# Altium PCB EvoHD_Lite_RevA.PcbDoc
Units mm, origin at the board's own origin, x right, y up, seen from the top; angles counter-clockwise.
Board outline 40 x 60 mm, 2 copper layers (Top Layer, Bottom Layer), stack 1.57 mm thick; 33 components, 53 nets, 321 pads, 38 vias.
Unrouted connection lines stored in the file: 56.
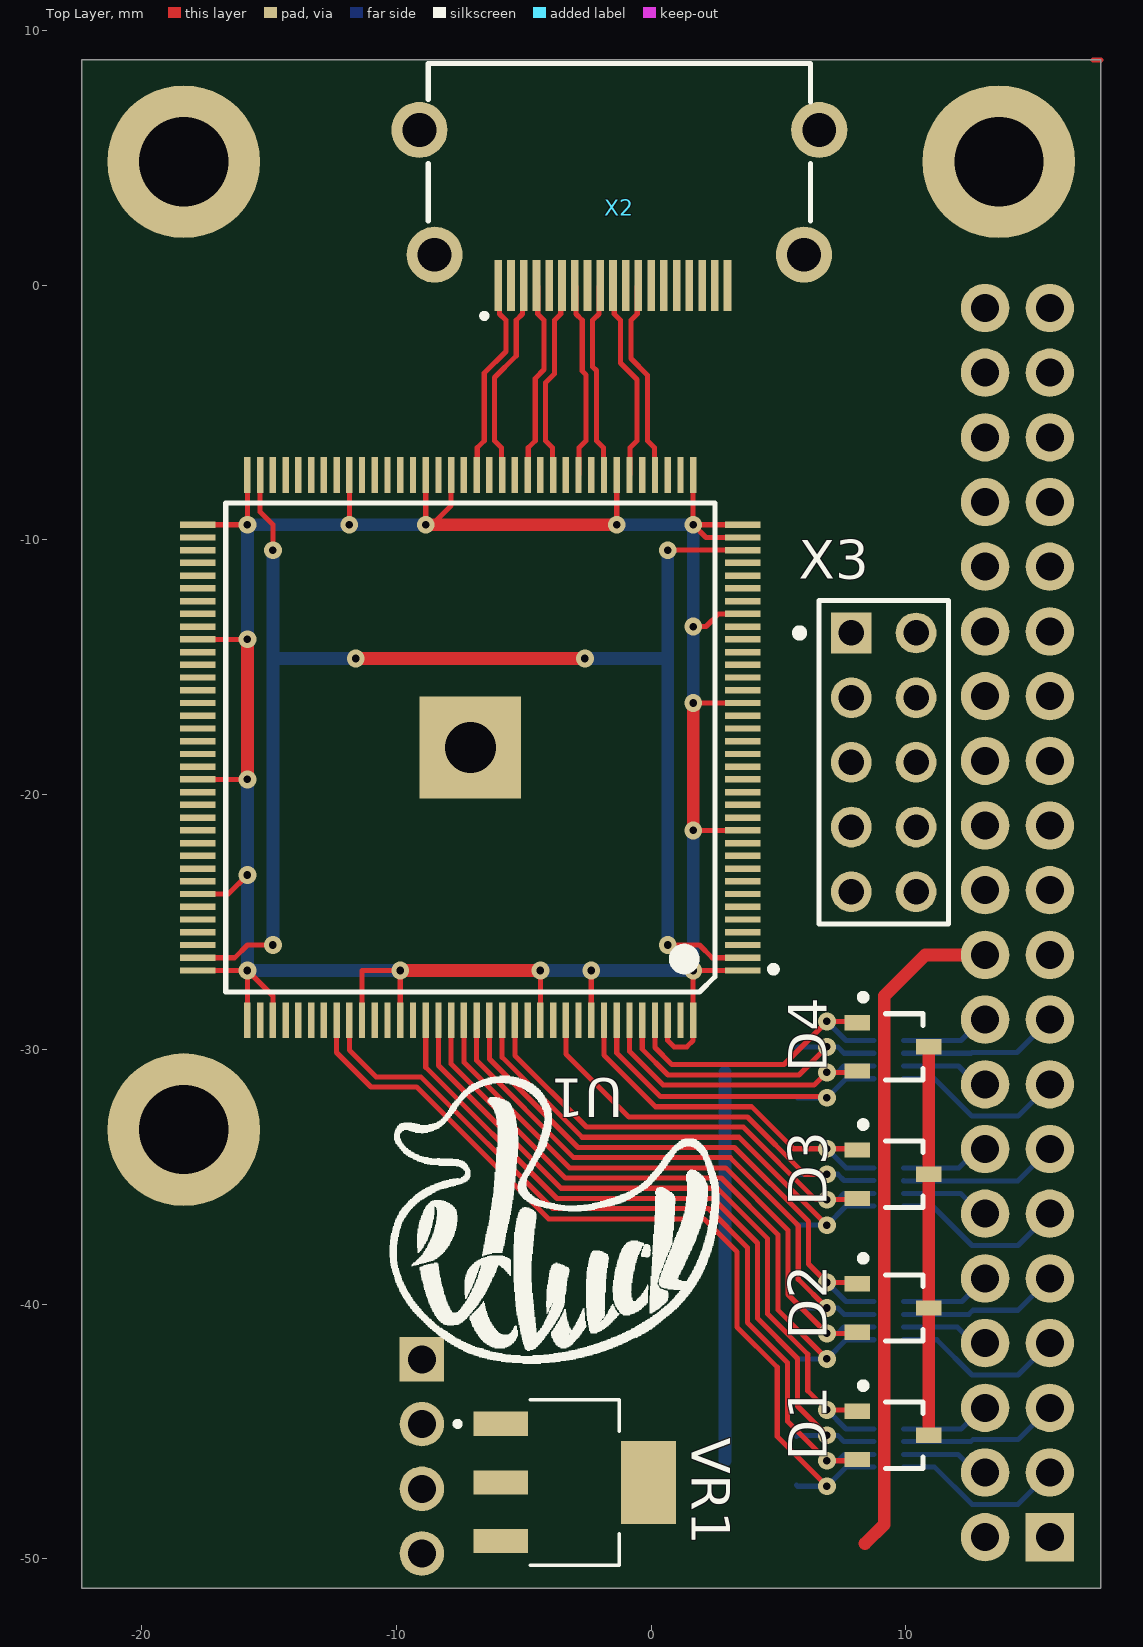
[diagram p0: Top Layer view]
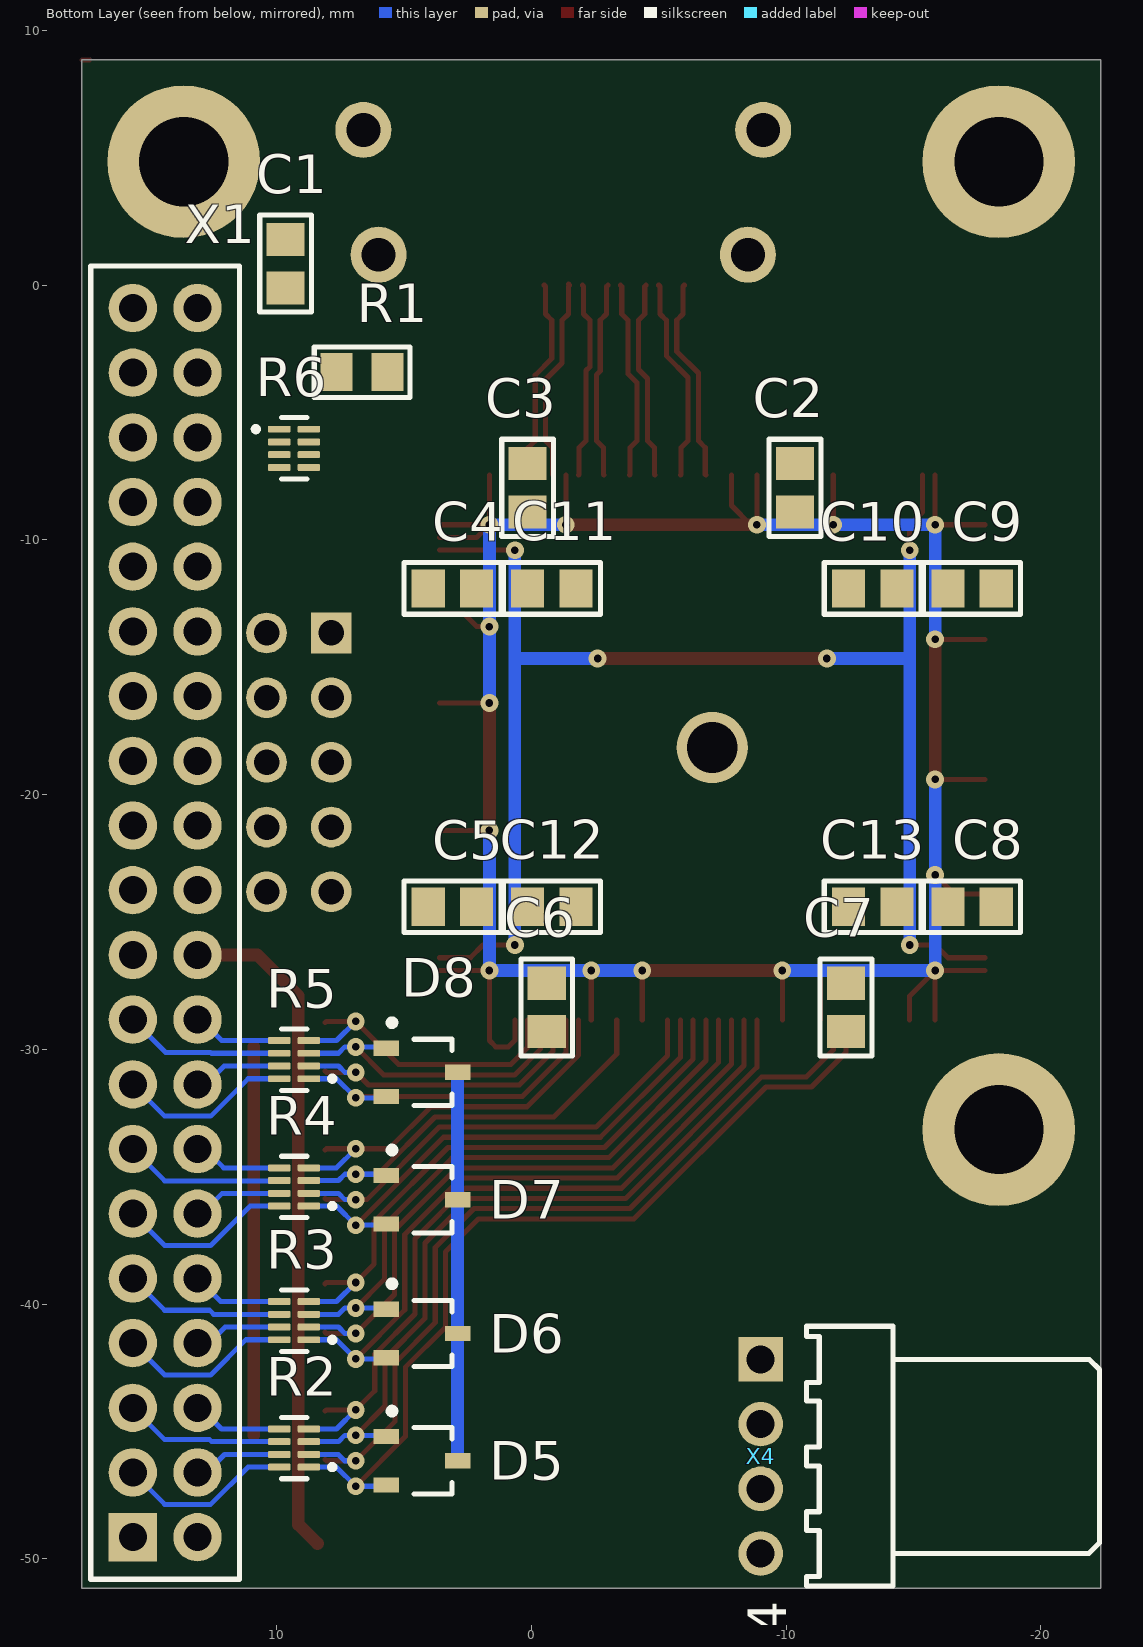
[diagram p1: Bottom Layer view, seen from below]
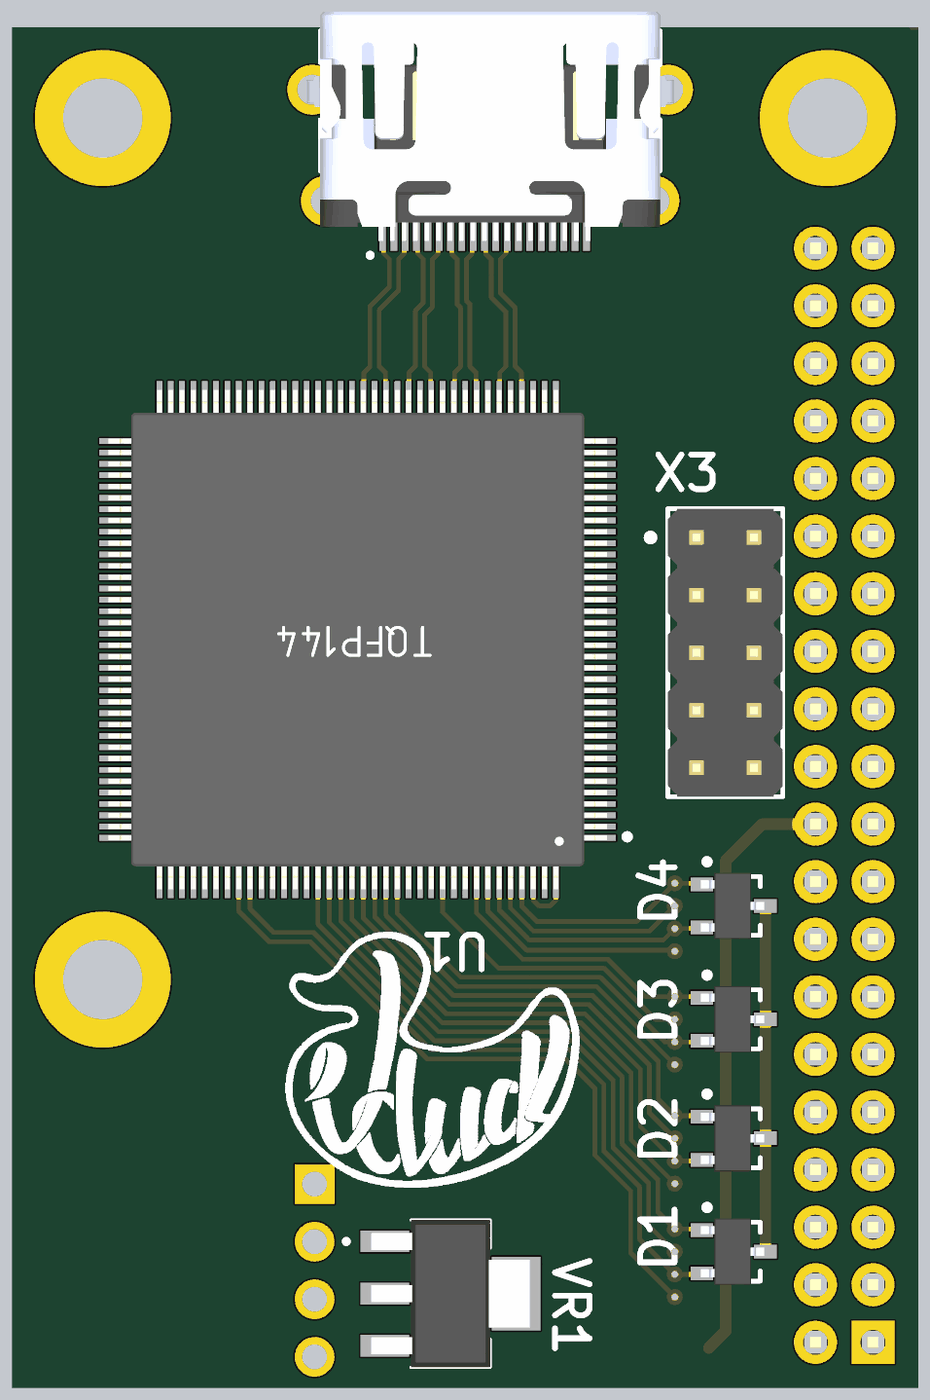
[diagram p2: 3D render of the assembled board from above, using the file's embedded part models]
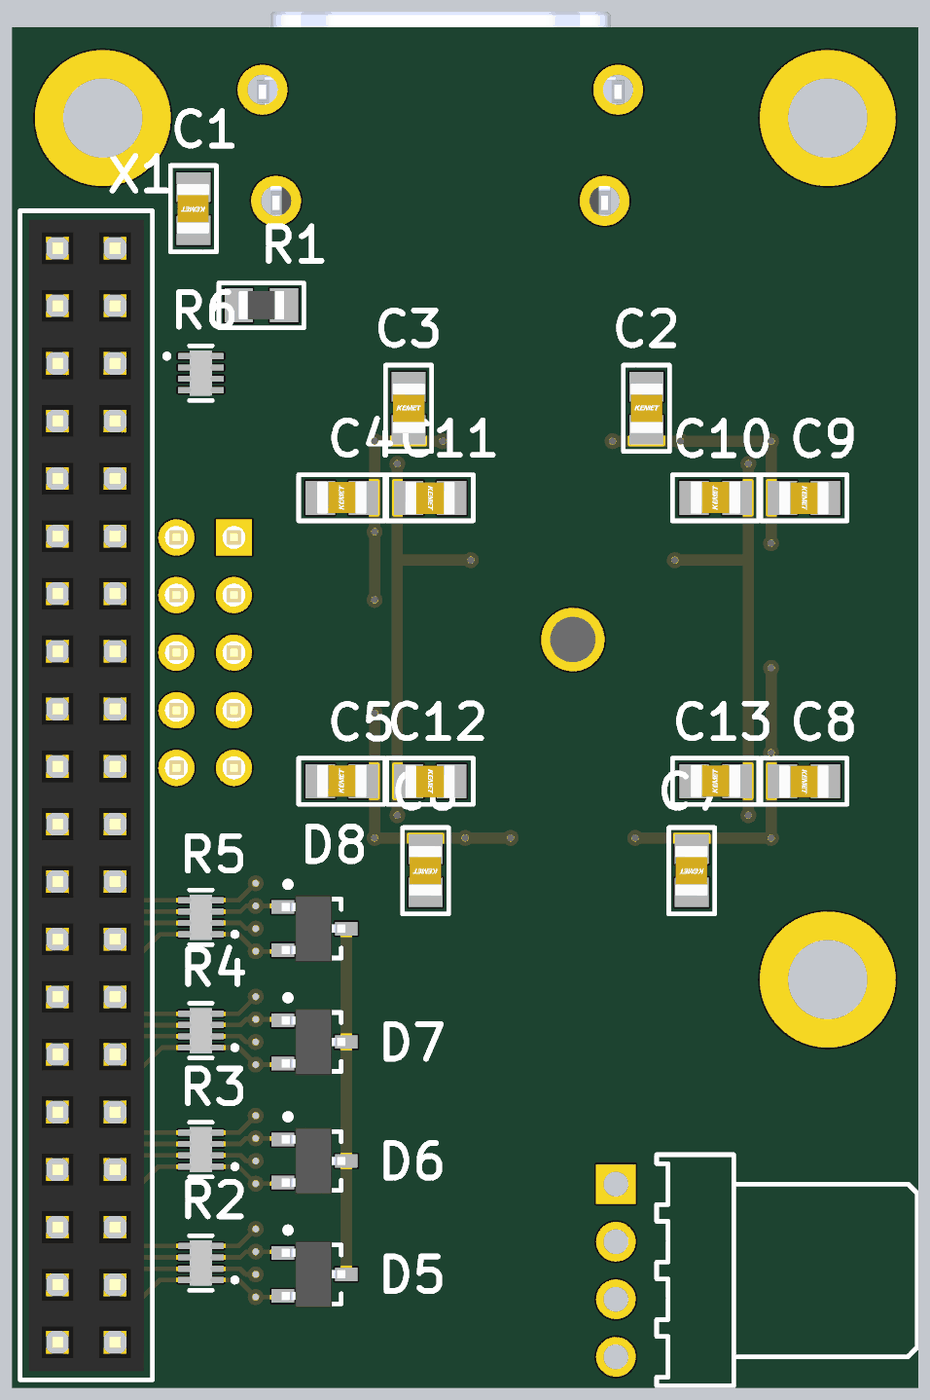
[diagram p3: 3D render of the assembled board from below, using the file's embedded part models]

## Layer stack, top to bottom
Top Solder: solder mask 0.0127, Solder Resist, Dk 3.8
Top Layer: signal copper 0.035
Dielectric: core 1.5, FR-4, Dk 4.5
Bottom Layer: signal copper 0.035
Bottom Solder: solder mask 0.0127, Solder Resist, Dk 3.8

## Board outline
-22.35,-51.15 17.65,-51.15 17.65,8.85 -22.35,8.85

## Design rules (kind name [scope] priority, off if disabled: settings)
BoardOutlineClearance [All] p1: gap=0.2 ignorepadtopadclearanceinfootprint=FALSE
Clearance [All] p1: gap=0.2 ignorepadtopadclearanceinfootprint=FALSE except(0.25: Arc-Hole Track-Hole SMDPad-Hole THPad-Hole Via-Hole Fill-Hole Poly-Hole Region-Hole Text-Hole)
ComponentClearance [All] p1: gap=0.127 collisioncheckmode=3 verticalgap=0.127 showdistances=TRUE
DiffPairsRouting [All] p1: maxlimit=0.381 minlimit=0.203 mostfreqgap=0.203 toplayer_minwidth=0.203 toplayer_maxwidth=25.4 toplayer_prefwidth=0.203 bottomlayer_minwidth=0.203 bottomlayer_maxwidth=25.4 bottomlayer_prefwidth=0.203 maxuncoupledlength=12.7
Height [All] p1: minheight=0 maxheight=1816.048 prefheight=12.7
HoleSize [All] p1: absolutevalues=TRUE maxlimit=6.3 minlimit=0.3 maxpercent=80.000 minpercent=20.000
HoleToHoleClearance [All] p1: gap=0.25 allowstackedmicrovias=FALSE
MinimumAnnularRing [All] p1: minimumring=0.076
MinimumSolderMaskSliver [All] p1: minsoldermaskwidth=0
PlaneClearance [All] p1: clearance=0.203
PlaneConnect PlaneConnectPowerPads [InPadClass('PowerPads')] p1: planeconnectstyle=Direct reliefexpansion=0.508 reliefentries=4 reliefconductorwidth=0.254 reliefairgap=0.254
PlaneConnect [All] p2: pad.planeconnectstyle=Relief pad.reliefexpansion=0.3 pad.reliefentries=4 pad.reliefconductorwidth=0.203 pad.reliefairgap=0.203 via.planeconnectstyle=Direct via.reliefexpansion=0.3 via.reliefentries=4 via.reliefconductorwidth=0.127 via.reliefairgap=0.127
PolygonConnect PolygonConnectPowerPads [All vs (InPadClass('PowerPads'))] p1: connectstyle=Direct reliefconductorwidth=0.254 reliefentries=4 polygonreliefangle="90 Angle" airgapwidth=0.254
PolygonConnect [All] p2: thpad.connectstyle=Relief thpad.reliefconductorwidth=0.203 thpad.reliefentries=4 thpad.polygonreliefangle="90 Angle" thpad.airgapwidth=0.203 smdpad.connectstyle=Relief smdpad.reliefconductorwidth=0.203 smdpad.reliefentries=4 smdpad.polygonreliefangle="90 Angle" smdpad.airgapwidth=0.203 via.connectstyle=Direct via.reliefconductorwidth=0.127 via.reliefentries=4 via.polygonreliefangle="90 Angle" via.airgapwidth=0.127
RoutingVias [All] p1: holewidth=0.3 width=0.6 viastyle="Through Hole" minholewidth=0.3 minwidth=0.6 maxholewidth=0.6 maxwidth=6.6
SilkToSilkClearance [All] p1: silktosilkclearance=0
SilkToSolderMaskClearance [IsPad] p1: minsilkscreentomaskgap=0.127 clearancetoexposedcopper=TRUE
SolderMaskExpansion [All] p1: expansion=0.075
Width [All] p1: maxlimit=25.4 minlimit=0.2 preferedwidth=0.2 minimp=50.000000 maximp=50.000000 favimp=50.000000
20 further rules are at their usual default settings.

## Classes and differential pairs
component class power: VR1 X4
differential pair class TDMS_DIFF: LVDS_CK LVDS_D0 LVDS_D1 LVDS_D2
net class TDMS: LVDS_CK_N LVDS_CK_P LVDS_D0_N LVDS_D0_P LVDS_D1_N LVDS_D1_P LVDS_D2_N LVDS_D2_P
component class HDMI: C1 R1 X2
component class fpga: C2 C3 C4 C5 C6 C7 C8 C9 C10 C11 C12 C13 U1 X3
component class bus: D1 D2 D3 D4 D5 D6 D7 D8 R2 R3 R4 R5 R6 X1
differential pair LVDS_D2: +LVDS_D2_P -LVDS_D2_N
differential pair LVDS_D1: +LVDS_D1_P -LVDS_D1_N
differential pair LVDS_D0: +LVDS_D0_P -LVDS_D0_N
differential pair LVDS_CK: +LVDS_CK_P -LVDS_CK_N

## Components (designator, comment, footprint, x,y, rotation, side; value= is the part's Value field where it differs from the comment)
C1 "0.1 uF" "0805 chip cap" 9.65,0.85 r90 bottom
C2 "0.1 uF" "0805 chip cap" -10.35,-7.95 r270 bottom
C3 "0.1 uF" "0805 chip cap" 0.15,-7.95 r270 bottom
C4 "0.1 uF" "0805 chip cap" 3.1,-11.9 r180 bottom
C5 "0.1 uF" "0805 chip cap" 3.1,-24.4 r180 bottom
C6 "0.1 uF" "0805 chip cap" -0.6,-28.35 r90 bottom
C7 "0.1 uF" "0805 chip cap" -12.35,-28.35 r90 bottom
C8 "0.1 uF" "0805 chip cap" -17.3,-24.4 r0 bottom
C9 "0.1 uF" "0805 chip cap" -17.3,-11.9 r0 bottom
C10 "0.1 uF" "0805 chip cap" -13.4,-11.9 r180 bottom
C11 "0.1 uF" "0805 chip cap" -0.8,-11.9 r0 bottom
C12 "0.1 uF" "0805 chip cap" -0.8,-24.4 r0 bottom
C13 "0.1 uF" "0805 chip cap" -13.4,-24.4 r180 bottom
D1 "BAT54C" SOT-23 9.5,-45.15 r270 top
D2 "BAT54C" SOT-23 9.5,-40.15 r270 top
D3 "BAT54C" SOT-23 9.5,-34.9 r270 top
D4 "BAT54C" SOT-23 9.5,-29.9 r270 top
D5 "BAT54C" SOT-23 4.3,-46.15 r270 bottom
D6 "BAT54C" SOT-23 4.3,-41.15 r270 bottom
D7 "BAT54C" SOT-23 4.3,-35.9 r270 bottom
D8 "BAT54C" SOT-23 4.3,-30.9 r270 bottom
R1 "10K" "0805 CHIP RES" 6.65,-3.4 r180 bottom
R2 "470" RESCAV50P200X100X55-8N 9.32,-45.65 r0 bottom
R3 "470" RESCAV50P200X100X55-8N 9.32,-40.65 r0 bottom
R4 "470" RESCAV50P200X100X55-8N 9.32,-35.4 r0 bottom
R5 "470" RESCAV50P200X100X55-8N 9.32,-30.4 r0 bottom
R6 "470" RESCAV50P200X100X55-8N 9.32,-6.4 r180 bottom
U1 "10m02sce144c8g" "Altera TQFP 50P 22X22 145N" -7.1,-18.15 r180 top locked
VR1 "LM1117IMP-3.3/NOPB" VREG_LM1117IMP-3.3/NOPB -3,-47 r0 top
X1 "IDE40M" IDE40M 13.11,-49.15 r270 bottom locked
X2 "SS-53000-001" STEWART_SS-53000-001 -1.25,0.3 r180 top
X3 "IDC10M" PLD2-10 7.86,-13.65 r90 top
X4 "NS25-W4K" NS25-W4K -9,-42.17 r270 bottom

## Footprints (in the part's own frame and the unit in brackets; to place one, negate y for a bottom-side part, rotate by r counter-clockwise, add the part's x,y. Pads: shape width x height; smd on the part's side, far side on the other; paste and mask are expansions set on the pad)
"0805 chip cap" [mm]
  rect 1.3x1.5 smd: 1(-0.95,0) 2(0.95,0)
  silkscreen extent -1.91,-1.02 1.91,1.02, body extent -1.1,-0.71 1.1,0.74, height 1
"0805 CHIP RES" [mm]
  rect 1.25x1.5 smd: 1(-1,-0.01) 2(1,-0.01)
  silkscreen extent -1.88,-1 1.88,0.97, body extent -1,-0.63 1,0.62, height 0.7
"Altera TQFP 50P 22X22 145N" [mm] "TSQFP, 144-Leads, Body 20,00x20,00mm, Pitch 0,50mm, Thermal Pad 4,00x4,00mm, IPC Medium Density"
  rect 1.4x0.25 smd: 1(-10.7,8.75) 2(-10.7,8.25) 3(-10.7,7.75) 4(-10.7,7.25) 5(-10.7,6.75) 6(-10.7,6.25) 7(-10.7,5.75) 8(-10.7,5.25) 9(-10.7,4.75) 10(-10.7,4.25) 11(-10.7,3.75) 12(-10.7,3.25) 13(-10.7,2.75) 14(-10.7,2.25) 15(-10.7,1.75) 16(-10.7,1.25) 17(-10.7,0.75) 18(-10.7,0.25) 19(-10.7,-0.25) 20(-10.7,-0.75) 21(-10.7,-1.25) 22(-10.7,-1.75) 23(-10.7,-2.25) 24(-10.7,-2.75) 25(-10.7,-3.25) 26(-10.7,-3.75) 27(-10.7,-4.25) 28(-10.7,-4.75) 29(-10.7,-5.25) 30(-10.7,-5.75) 31(-10.7,-6.25) 32(-10.7,-6.75) 33(-10.7,-7.25) 34(-10.7,-7.75) 35(-10.7,-8.25) 36(-10.7,-8.75) 73(10.7,-8.75) 74(10.7,-8.25) 75(10.7,-7.75) 76(10.7,-7.25) 77(10.7,-6.75) 78(10.7,-6.25) 79(10.7,-5.75) 80(10.7,-5.25) 81(10.7,-4.75) 82(10.7,-4.25) 83(10.7,-3.75) 84(10.7,-3.25) 85(10.7,-2.75) 86(10.7,-2.25) 87(10.7,-1.75) 88(10.7,-1.25) 89(10.7,-0.75) 90(10.7,-0.25) 91(10.7,0.25) 92(10.7,0.75) 93(10.7,1.25) 94(10.7,1.75) 95(10.7,2.25) 96(10.7,2.75) 97(10.7,3.25) 98(10.7,3.75) 99(10.7,4.25) 100(10.7,4.75) 101(10.7,5.25) 102(10.7,5.75) 103(10.7,6.25) 104(10.7,6.75) 105(10.7,7.25) 106(10.7,7.75) 107(10.7,8.25) 108(10.7,8.75)
  rect 0.25x1.4 smd: 37(-8.75,-10.7) 38(-8.25,-10.7) 39(-7.75,-10.7) 40(-7.25,-10.7) 41(-6.75,-10.7) 42(-6.25,-10.7) 43(-5.75,-10.7) 44(-5.25,-10.7) 45(-4.75,-10.7) 46(-4.25,-10.7) 47(-3.75,-10.7) 48(-3.25,-10.7) 49(-2.75,-10.7) 50(-2.25,-10.7) 51(-1.75,-10.7) 52(-1.25,-10.7) 53(-0.75,-10.7) 54(-0.25,-10.7) 55(0.25,-10.7) 56(0.75,-10.7) 57(1.25,-10.7) 58(1.75,-10.7) 59(2.25,-10.7) 60(2.75,-10.7) 61(3.25,-10.7) 62(3.75,-10.7) 63(4.25,-10.7) 64(4.75,-10.7) 65(5.25,-10.7) 66(5.75,-10.7) 67(6.25,-10.7) 68(6.75,-10.7) 69(7.25,-10.7) 70(7.75,-10.7) 71(8.25,-10.7) 72(8.75,-10.7) 109(8.75,10.7) 110(8.25,10.7) 111(7.75,10.7) 112(7.25,10.7) 113(6.75,10.7) 114(6.25,10.7) 115(5.75,10.7) 116(5.25,10.7) 117(4.75,10.7) 118(4.25,10.7) 119(3.75,10.7) 120(3.25,10.7) 121(2.75,10.7) 122(2.25,10.7) 123(1.75,10.7) 124(1.25,10.7) 125(0.75,10.7) 126(0.25,10.7) 127(-0.25,10.7) 128(-0.75,10.7) 129(-1.25,10.7) 130(-1.75,10.7) 131(-2.25,10.7) 132(-2.75,10.7) 133(-3.25,10.7) 134(-3.75,10.7) 135(-4.25,10.7) 136(-4.75,10.7) 137(-5.25,10.7) 138(-5.75,10.7) 139(-6.25,10.7) 140(-6.75,10.7) 141(-7.25,10.7) 142(-7.75,10.7) 143(-8.25,10.7) 144(-8.75,10.7)
  rect 4x4 / inner rect 4x4 / far side round 2.8 hole 2: 145(0,0)
  silkscreen extent -12.03,-9.6 9.6,9.6, body extent -11.01,-11.01 11.01,11.01, height 1.55
IDE40M [mm]
  rect 1.9x1.9 / inner rect 1.4x1.4 / far side rect 1.9x1.9 hole 1.1: 1(0,-2.54)
  round 1.9 / inner round 1.4 / far side round 1.9 hole 1.1: 2(0,0) 3(-2.54,-2.54) 4(-2.54,0) 5(-5.08,-2.54) 6(-5.08,0) 7(-7.62,-2.54) 8(-7.62,0) 9(-10.16,-2.54) 10(-10.16,0) 11(-12.7,-2.54) 12(-12.7,0) 13(-15.24,-2.54) 14(-15.24,0) 15(-17.78,-2.54) 16(-17.78,0) 17(-20.32,-2.54) 18(-20.32,0) 19(-22.86,-2.54) 20(-22.86,0) 21(-25.4,-2.54) 22(-25.4,0) 23(-27.94,-2.54) 24(-27.94,0) 25(-30.48,-2.54) 26(-30.48,0) 27(-33.02,-2.54) 28(-33.02,0) 29(-35.56,-2.54) 30(-35.56,0) 31(-38.1,-2.54) 32(-38.1,0) 33(-40.64,-2.54) 34(-40.64,0) 35(-43.18,-2.54) 36(-43.18,0) 37(-45.72,-2.54) 38(-45.72,0) 39(-48.26,-2.54) 40(-48.26,0)
  silkscreen extent -49.91,-4.19 1.65,1.65, body extent -49.53,-3.81 1.27,1.27, height 8.4
NS25-W4K [mm]
  rect 1.75x1.75 hole 1.1: 1(0,0)
  round 1.75 hole 1.1: 2(2.54,0) 3(5.08,0) 4(7.62,0)
  silkscreen extent -1.3,1.8 8.9,13.3
PLD2-10 [mm]
  rect 1.6x1.6 hole 1: 1(0,0)
  round 1.6 hole 1: 2(0,-2.54) 3(-2.54,0) 4(-2.54,-2.54) 5(-5.08,0) 6(-5.08,-2.54) 7(-7.62,0) 8(-7.62,-2.54) 9(-10.16,0) 10(-10.16,-2.54)
  silkscreen extent -11.43,-3.81 1.27,2.18, body extent -11.43,-3.81 1.27,1.27, height 8.6
RESCAV50P200X100X55-8N [mm]
  rrect25% 0.87x0.27 smd: 1(-0.58,0.75) 2(-0.58,0.25) 3(-0.58,-0.25) 4(-0.58,-0.75) 5(0.58,-0.75) 6(0.58,-0.25) 7(0.58,0.25) 8(0.58,0.75)
  silkscreen extent -1.6,-1.2 0.5,1.2, body extent -0.5,-1 0.5,1, height 0.37
SOT-23 [mm] "SOT-23; 3 Leads; Body 3.1 x 2.5 mm, inc. leads (LxW max)"
  rect 0.6x1 smd: 1(-0.95,-1.4) 2(0.95,-1.4) 3(0,1.4)
  silkscreen extent -2.07,-1.3 1.3,1.18, body extent -1.46,-1.45 1.46,1.35, height 1.2
STEWART_SS-53000-001 [mm]
  rect 0.3x2 smd: 1(4.75,0.3) 2(4.25,0.3) 3(3.75,0.3) 4(3.25,0.3) 5(2.75,0.3) 6(2.25,0.3) 7(1.75,0.3) 8(1.25,0.3) 9(0.75,0.3) 10(0.25,0.3) 11(-0.25,0.3) 12(-0.75,0.3) 13(-1.25,0.3) 14(-1.75,0.3) 15(-2.25,0.3) 16(-2.75,0.3) 17(-3.25,0.3) 18(-3.75,0.3) 19(-4.25,0.3)
  round 2.2 hole 1.33: S1(7.25,-0.9) S2(-7.25,-0.9) S3(-7.85,-5.8) S4(7.85,-5.8)
  silkscreen extent -7.5,-8.4 7.5,1.6, body extent -8.1,-9.25 8.1,0.86, height 6.17
VREG_LM1117IMP-3.3/NOPB [mm]
  rect 2.15x0.95 smd: 1(-2.9,2.3) 2(-2.9,0) 3(-2.9,-2.3)
  rect 2.15x3.25 smd: 4(2.9,0)
  silkscreen extent -4.7,-3.25 1.75,3.25, body extent -3.5,-3.25 3.5,3.25, height 1.8

## Part data
C1 C2 C3 C4 C5 C6 C7 C8 C9 C10 C11 C12 C13: library part Cap, "Capacitor"
R1: library part "CHIP RES", "Resistor"
R2 R3 R4 R5 R6: library part CAT10-***4LF, "*** Ohm A±5% 62.5mW Power Per Element Isolated Resistor Network/Array A±250ppm/A°C 0804, Concave, Long Side Terminals", Package=None, Availability=Unavailable, MP=CAT10-101J4LF, Price=None
U1: "FPGA MAX10"
VR1: "800-mA 15-V linear voltage regulator 4-SOT-223 0 to 125", Package=None, Availability=Unavailable, MP=LM1117IMP-3.3/NOPB, Price=None
X2: "HDMI Connector", Package=None, Availability=Unavailable, MF="Stewart Connector", MP=SS-53000-001, Price=None, SnapEDA_Link=https://www.snapeda.com/parts/SS-53000-001/Stewart%20Connector/view-part/4628816/?ref=snap
X3: library part PLD2-10

## Free pads (board coordinates)
  round 6 hole 3.5: 1(-18.35,4.85) 2(-18.35,-33.15) 2(13.65,4.85)

## Via types
v1: diameter 0.7, hole 0.3, Top Layer to Bottom Layer, tented both sides, 38 vias

## Nets (pads, with @x,y where several pads share a name; then routed paths per layer and width w, separated by ;. In a path a pad name is that pad's centre, name@x,y a point inside that pad or via, vN(x,y) a via of type N, cw(c..) or ccw(c..) an arc to the next point about the centre after c; other vN are vias at no path point)
3V3: C2.2 C3.2 C4.2 C5.2 C6.2 C7.2 C8.2 C9.2 D1.3 D2.3 D3.3 D4.3 D5.3 D6.3 D7.3 D8.3 U1.1 U1.12 U1.22 U1.29 U1.35 U1.36 U1.37 U1.43 U1.56 U1.58 U1.64 U1.72 U1.73 U1.82 U1.93 U1.102 U1.108 U1.109 U1.111 U1.118 U1.121 U1.132 U1.136 U1.142 U1.144 | length 153.3
  Top Layer w0.2: U1.108 v1(-15.85,-26.9) ; U1.102 -16.6,-23.9 v1(-15.85,-23.15) ; U1.93 v1(-15.85,-19.4) ; U1.82 v1(-15.85,-13.9) ; U1.73 v1(-15.85,-9.4) U1.72 ; U1.109 v1(-15.85,-26.9) ; U1.111 -14.85,-27.9 v1(-15.85,-26.9) ; v1(-11.85,-9.4) U1.64 ; U1.118 -11.35,-26.9 v1(-9.85,-26.9) U1.121 ; U1.58 v1(-8.85,-9.4) -8.6,-9.4 -7.85,-8.65 U1.56 ; U1.132 v1(-4.35,-26.9) ; U1.136 v1(-2.35,-26.9) ; v1(-1.35,-9.4) U1.43 ; U1.142 0.65,-29.65 0.9,-29.9 1.4,-29.9 1.65,-29.65 U1.144 v1(1.65,-26.9) 2.15,-26.9 U1.1 ; v1(1.65,-21.4) U1.12 ; v1(1.65,-16.4) U1.22 ; v1(1.65,-13.4) 2.15,-13.4 2.65,-12.9 U1.29 ; U1.37 v1(1.65,-9.4) ; U1.35 2.15,-9.9 v1(1.65,-9.4) ; U1.36 v1(1.65,-9.4)
  Top Layer w0.5: v1(-15.85,-19.4) v1(-15.85,-13.9) ; v1(-9.85,-26.9) v1(-4.35,-26.9) ; v1(-8.85,-9.4) v1(-1.35,-9.4) ; v1(1.65,-21.4) v1(1.65,-16.4) ; D1.3 D2.3 D3.3 D4.3
  Bottom Layer w0.5: v1(-15.85,-19.4) v1(-15.85,-23.15) v1(-15.85,-26.9) v1(-9.85,-26.9) ; v1(-15.85,-13.9) v1(-15.85,-9.4) v1(-11.85,-9.4) v1(-8.85,-9.4) ; v1(-4.35,-26.9) v1(-2.35,-26.9) v1(1.65,-26.9) v1(1.65,-21.4) ; v1(-1.35,-9.4) v1(1.65,-9.4) v1(1.65,-13.4) v1(1.65,-16.4) ; D5.3 D6.3 D7.3 D8.3
5V0: C1.2 X1.20 X2.18 | length 26.4
  Top Layer w0.5: 8.4,-49.4 9.15,-48.65 9.15,-27.9 10.76,-26.29 X1.20
B0: D2.2 R3.2 U1.126 | length 25
  Top Layer w0.2: U1.126 -7.35,-30.503 -3.203,-34.65 2.925,-34.65 5.375,-37.1 5.375,-39.625 v1(6.9,-41.15) 8.05,-41.15 D2.2
  Bottom Layer w0.2: v1(6.9,-41.15) 7.325,-41.15 7.575,-40.9 R3.2
B1: D2.1 R3.4 U1.128 | length 22.8
  Top Layer w0.2: U1.128 -6.35,-30.372 -2.872,-33.85 3.275,-33.85 6.175,-36.75 6.175,-38.425 v1(6.9,-39.15) 8.05,-39.15 D2.1
  Bottom Layer w0.2: v1(6.9,-39.15) 7.65,-39.9 R3.4
B2: D3.2 R4.2 U1.130 | length 19.1
  Top Layer w0.2: U1.130 -5.35,-30.24 -2.54,-33.05 3.616,-33.05 6.466,-35.9 v1(6.9,-35.9) 8.05,-35.9 D3.2
  Bottom Layer w0.2: v1(6.9,-35.9) 7.325,-35.9 7.575,-35.65 R4.2
B3: D3.1 R4.4 U1.137 | length 15
  Top Layer w0.2: U1.137 -1.85,-30.225 0.175,-32.25 3.947,-32.25 5.597,-33.9 v1(6.9,-33.9) 8.05,-33.9 D3.1
  Bottom Layer w0.2: v1(6.9,-33.9) 7.65,-34.65 R4.4
B4: D4.2 R5.2 U1.139 | length 12.9
  Top Layer w0.2: U1.139 -0.85,-30.075 0.475,-31.4 6.4,-31.4 v1(6.9,-30.9) 8.05,-30.9 D4.2
  Bottom Layer w0.2: v1(6.9,-30.9) 7.325,-30.9 7.575,-30.65 R5.2
G0: D6.2 R3.1 U1.125 | length 26.4
  Top Layer w0.2: U1.125 -7.85,-30.569 -3.369,-35.05 2.759,-35.05 4.975,-37.266 4.975,-40.225 v1(6.9,-42.15)
  Bottom Layer w0.2: D6.2 5.75,-42.15 v1(6.9,-42.15) 7.65,-41.4 R3.1
G1: D5.1 R2.3 U1.123 | length 29.6
  Top Layer w0.2: U1.123 -8.85,-30.7 -3.7,-35.85 2.428,-35.85 4.175,-37.597 4.175,-40.556 5.75,-42.131 5.75,-44 v1(6.9,-45.15)
  Bottom Layer w0.2: D5.1 5.75,-45.15 v1(6.9,-45.15) 7.325,-45.15 7.575,-45.4 R2.3
G2: D5.2 R2.1 U1.116 | length 34.3
  Top Layer w0.2: U1.116 -12.35,-30.125 -11,-31.475 -9.206,-31.475 -4.031,-36.65 2.078,-36.65 3.375,-37.947 3.375,-40.903 4.95,-42.478 4.95,-45.2 v1(6.9,-47.15)
  Bottom Layer w0.2: D5.2 5.75,-47.15 v1(6.9,-47.15) 7.65,-46.4 R2.1
G3: D1.2 R2.2 U1.117 | length 32.8
  Top Layer w0.2: U1.117 -11.85,-30.025 -10.8,-31.075 -9.041,-31.075 -3.866,-36.25 2.25,-36.25 3.775,-37.775 3.775,-40.722 5.35,-42.297 5.35,-44.6 v1(6.9,-46.15) 8.05,-46.15 D1.2
  Bottom Layer w0.2: v1(6.9,-46.15) 7.334,-46.15 7.584,-45.9 R2.2
G4: D1.1 R2.4 U1.124 | length 28.6
  Top Layer w0.2: U1.124 -8.35,-30.634 -3.534,-35.45 2.594,-35.45 4.575,-37.431 4.575,-40.391 6.15,-41.966 6.15,-43.4 v1(6.9,-44.15) 8.05,-44.15 D1.1
  Bottom Layer w0.2: v1(6.9,-44.15) 7.65,-44.9 R2.4
GND: C1.1 C2.1 C3.1 C4.1 C5.1 C6.1 C7.1 C8.1 C9.1 C10.1 C11.1 C12.1 C13.1 R1.1 U1.11 U1.20 U1.30 U1.38 U1.45 U1.57 U1.66 U1.83 U1.96 U1.104 U1.110 U1.119 U1.133 U1.143 U1.145 X1.2 X1.19 X1.22 X1.24 X1.26 X1.30 X1.40 X2.2 X2.5 X2.8 X2.11 X2.17 X2.S1 X2.S2 X2.S3 X2.S4
LVDS_CK_N: U1.40 X2.12 | length 8
  Top Layer w0.203: X2.12 -0.548,-0.048 -0.548,-1.125 -0.797,-1.373 -0.797,-2.878 -0.147,-3.528 -0.147,-6.103 0.127,-6.377 0.127,-7.427 U1.40
LVDS_CK_P: U1.42 X2.10 | length 8
  Top Layer w0.203: X2.10@-1.452,0.048 X2.10 -1.452,-0.048 -1.452,-1.125 -1.203,-1.373 -1.203,-3.047 -0.553,-3.697 -0.553,-6.103 -0.827,-6.377 -0.827,-7.427 U1.42
LVDS_D0_N: U1.44 X2.9 | length 7.8
  Top Layer w0.203: X2.9 -2.048,-0.048 -2.048,-1.125 -2.297,-1.373 -2.297,-3.198 -2.147,-3.348 -2.147,-6.042 -2.147,-6.103 -1.873,-6.377 -1.873,-7.427 U1.44
LVDS_D0_P: U1.46 X2.7 | length 7.8
  Top Layer w0.203: X2.7 -2.952,-0.048 -2.952,-1.125 -2.703,-1.373 -2.703,-3.366 -2.553,-3.516 -2.553,-5.874 -2.553,-6.103 -2.827,-6.377 -2.827,-7.427 U1.46
LVDS_D1_N: U1.48 X2.6 | length 7.8
  Top Layer w0.203: U1.48 -3.873,-7.427 -3.873,-6.377 -4.147,-6.103 -4.147,-3.825 -3.797,-3.475 -3.797,-1.373 -3.548,-1.125 -3.548,-0.048 X2.6
LVDS_D1_P: U1.50 X2.4 | length 7.8
  Top Layer w0.203: U1.50 -4.827,-7.427 -4.827,-6.377 -4.553,-6.103 -4.553,-3.657 -4.203,-3.307 -4.203,-1.373 -4.452,-1.125 -4.452,-0.048 X2.4
LVDS_D2_N: U1.52 X2.3 | length 8
  Top Layer w0.203: U1.52 -5.873,-7.427 -5.873,-6.377 -6.147,-6.103 -6.147,-6.002 -6.147,-3.616 -5.297,-2.766 -5.297,-1.373 -5.048,-1.125 -5.048,-0.048 X2.3
LVDS_D2_P: U1.54 X2.1 | length 8
  Top Layer w0.203: U1.54 -6.827,-7.427 -6.827,-6.377 -6.553,-6.103 -6.553,-5.834 -6.553,-3.448 -5.703,-2.598 -5.703,-1.373 -5.952,-1.125 -5.952,-0.048 X2.1
MODE: D4.1 R5.4 U1.141 | length 12.2
  Top Layer w0.2: U1.141 0.15,-29.925 0.813,-30.588 5.212,-30.588 v1(6.9,-28.9) 8.05,-28.9 D4.1
  Bottom Layer w0.2: v1(6.9,-28.9) 7.65,-29.65 R5.4
NetR1_2: R1.2 X2.19
R0: D8.1 R5.3 U1.140 | length 12.4
  Top Layer w0.2: U1.140 -0.35,-29.991 0.659,-31 5.8,-31 v1(6.9,-29.9)
  Bottom Layer w0.2: D8.1 5.75,-29.9 v1(6.9,-29.9) 7.325,-29.9 7.575,-30.15 R5.3
R1: D8.2 R5.1 U1.138 | length 13.6
  Top Layer w0.2: U1.138 -1.35,-30.141 0.359,-31.85 v1@6.9,-31.85
  Bottom Layer w0.2: D8.2 5.75,-31.9 v1(6.9,-31.9) 7.65,-31.15 R5.1
R2: D7.1 R4.3 U1.134 | length 16.7
  Top Layer w0.2: U1.134 -3.35,-30.175 -0.875,-32.65 3.781,-32.65 6.031,-34.9 v1(6.9,-34.9)
  Bottom Layer w0.2: D7.1 5.75,-34.9 v1(6.9,-34.9) 7.325,-34.9 7.575,-35.15 R4.3
R3: D7.2 R4.1 U1.129 | length 20.3
  Top Layer w0.2: U1.129 -5.85,-30.306 -2.706,-33.45 3.45,-33.45 v1(6.9,-36.9)
  Bottom Layer w0.2: D7.2 5.75,-36.9 v1(6.9,-36.9) 7.65,-36.15 R4.1
R4: D6.1 R3.3 U1.127 | length 23.8
  Top Layer w0.2: U1.127 -6.85,-30.437 -3.037,-34.25 3.109,-34.25 5.775,-36.916 5.775,-39.025 v1(6.9,-40.15)
  Bottom Layer w0.2: D6.1 5.75,-40.15 v1(6.9,-40.15) 7.325,-40.15 7.575,-40.4 R3.3
TCK: U1.16
TDI: U1.17
TDO: U1.18
TMS: U1.15
VCCA: C10.2 C11.2 C12.2 C13.2 U1.2 U1.34 U1.71 U1.107 | length 58.9
  Top Layer w0.2: U1.107 -16.35,-26.4 -15.85,-25.9 v1(-14.85,-25.9) ; U1.71 -15.35,-8.9 -14.85,-9.4 v1(-14.85,-10.4) ; v1(0.65,-25.9) 1.9,-25.9 2.4,-26.4 U1.2 ; v1(0.65,-10.4) U1.34
  Top Layer w0.5: v1(-11.6,-14.65) v1(-2.6,-14.65)
  Bottom Layer w0.5: v1(-14.85,-25.9) -14.85,-14.65 ; v1(-14.85,-10.4) -14.85,-14.65 ; v1(-11.6,-14.65) -14.85,-14.65 ; v1(-2.6,-14.65) 0.65,-14.65 ; v1(0.65,-25.9) 0.65,-14.65 ; v1(0.65,-10.4) 0.65,-14.65
VO_: R6.1 R6.2 R6.3 R6.4 R6.5 R6.6 R6.7 R6.8
VO_B0: R3.7 X1.8 | length 3.5
  Bottom Layer w0.2: R3.7 12.02,-40.9 12.65,-41.53 X1.8
VO_B1: R3.5 X1.10 | length 3.6
  Bottom Layer w0.2: R3.5 12.2,-39.9 X1.10
VO_B2: R4.7 X1.12 | length 3.5
  Bottom Layer w0.2: R4.7 12.142,-35.65 12.942,-36.45 X1.12
VO_B3: R4.5 X1.14 | length 3.5
  Bottom Layer w0.2: R4.5 12.082,-34.65 12.822,-33.91 X1.14
VO_B4: R5.7 X1.16 | length 3.5
  Bottom Layer w0.2: R5.7 12.062,-30.65 12.782,-31.37 X1.16
VO_CLK: X1.33
VO_G0: R3.8 X1.7 | length 6.8
  Bottom Layer w0.2: R3.8 11.212,-41.4 12.592,-42.78 14.4,-42.78 X1.7
VO_G1: R2.6 X1.5 | length 6.3
  Bottom Layer w0.2: R2.6 12.552,-45.4 12.632,-45.32 14.4,-45.32 X1.5
VO_G2: R2.8 X1.3 | length 6.9
  Bottom Layer w0.2: R2.8 11.132,-46.4 12.592,-47.86 14.4,-47.86 X1.3
VO_G3: R2.7 X1.4 | length 3.5
  Bottom Layer w0.2: R2.7 12.052,-45.9 12.762,-46.61 X1.4
VO_G4: R2.5 X1.6 | length 3.6
  Bottom Layer w0.2: R2.5 12.172,-44.9 13.002,-44.07 X1.6
VO_HS: X1.36
VO_MODE: R5.5 X1.18 | length 3.5
  Bottom Layer w0.2: R5.5 12.162,-29.65 12.982,-28.83 X1.18
VO_R0: R5.6 X1.17 | length 6.3
  Bottom Layer w0.2: R5.6 12.562,-30.15 12.592,-30.12 14.36,-30.12 X1.17
VO_R1: R5.8 X1.15 | length 6.9
  Bottom Layer w0.2: R5.8 11.122,-31.15 12.592,-32.62 14.4,-32.62 X1.15
VO_R2: R4.6 X1.13 | length 6.3
  Bottom Layer w0.2: R4.6 9.91,-35.16 14.4,-35.16 X1.13
VO_R3: R4.8 X1.11 | length 6.9
  Bottom Layer w0.2: R4.8 11.042,-36.15 12.592,-37.7 14.4,-37.7 X1.11
VO_R4: R3.6 X1.9 | length 6.3
  Bottom Layer w0.2: R3.6 12.472,-40.4 12.632,-40.24 14.4,-40.24 X1.9
VO_VS: X1.38
pads on no net: U1.3 U1.4 U1.5 U1.6 U1.7 U1.8 U1.9 U1.10 U1.13 U1.14 U1.19 U1.21 U1.23 U1.24 U1.25 U1.26 U1.27 U1.28 U1.31 U1.32 U1.33 U1.39 U1.41 U1.47 U1.49 U1.51 U1.53 U1.55 U1.59 U1.60 U1.61 U1.62 U1.63 U1.65 U1.67 U1.68 U1.69 U1.70 U1.74 U1.75 U1.76 U1.77 U1.78 U1.79 U1.80 U1.81 U1.84 U1.85 U1.86 U1.87 U1.88 U1.89 U1.90 U1.91 U1.92 U1.94 U1.95 U1.97 U1.98 U1.99 U1.100 U1.101 U1.103 U1.105 U1.106 U1.112 U1.113 U1.114 U1.115 U1.120 U1.122 U1.131 U1.135 VR1.1 VR1.2 VR1.3 VR1.4 X1.1 X1.21 X1.23 X1.25 X1.27 X1.28 X1.29 X1.31 X1.32 X1.34 X1.35 X1.37 X1.39 X2.13 X2.14 X2.15 X2.16 X3.1 X3.2 X3.3 X3.4 X3.5 X3.6 X3.7 X3.8 X3.9 X3.10 X4.1 X4.2 X4.3 X4.4
copper on no net: | length 0.3
  Top Layer w0.2: 17.348,8.85 17.65,8.85

## Silkscreen, mask and mechanical layers (free items; w line width, h text height)
Top Overlay:
  drawing of 2980 lines, arcs and shapes, not listed
Mechanical 1:
  the board outline again, w0.2

## Dimensions
-22.35,8.85 to -22.35,-51.15 on Mechanical 13
-22.35,8.85 to 17.65,8.85 on Mechanical 13
-18.35,4.85 to -22.35,8.85 on Mechanical 13
-18.35,4.85 to -18.35,-33.15 on Mechanical 13
-18.35,4.85 to -22.35,8.85 on Mechanical 13